# Altium PCB Sheet2.PcbDoc
Units mm, origin at the board's own origin, x right, y up, seen from the top; angles counter-clockwise.
Board outline 91.17 x 61.71 mm, 2 copper layers (Top Layer, Bottom Layer); 46 components, 37 nets, 171 pads, 0 vias.
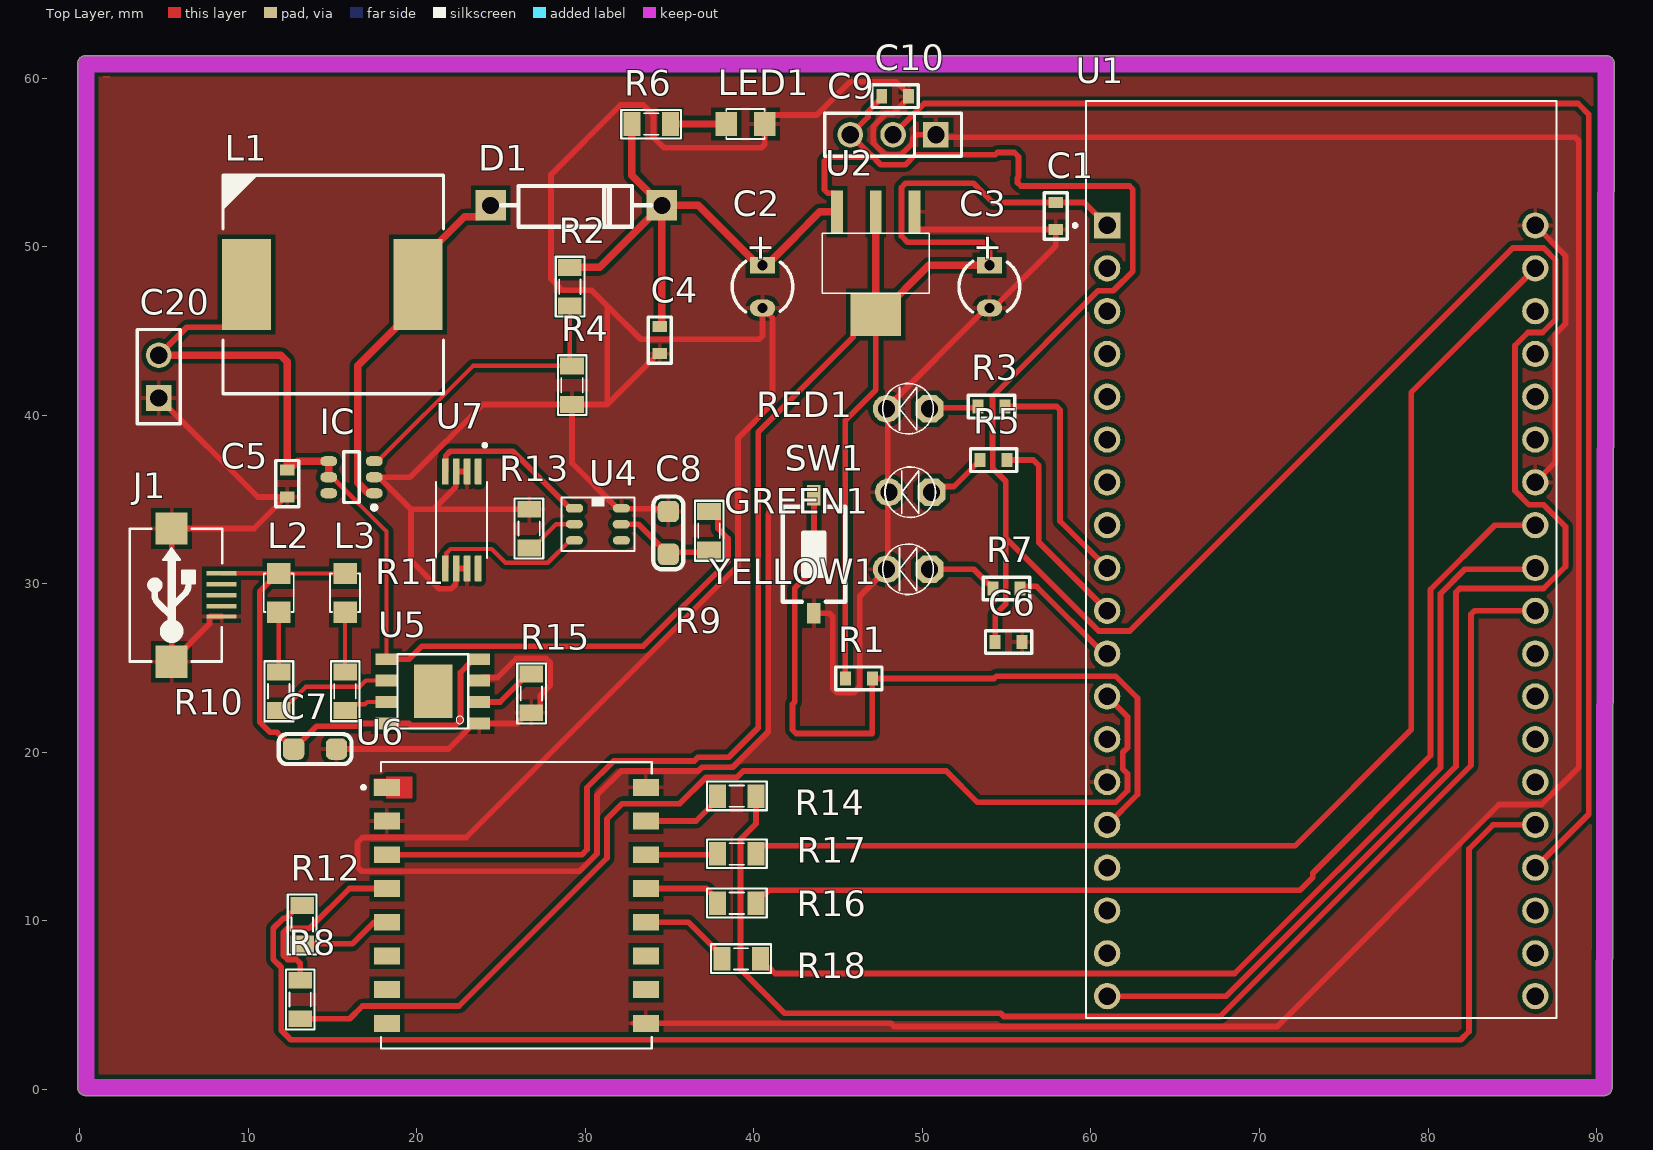
[diagram p0: Top Layer view]
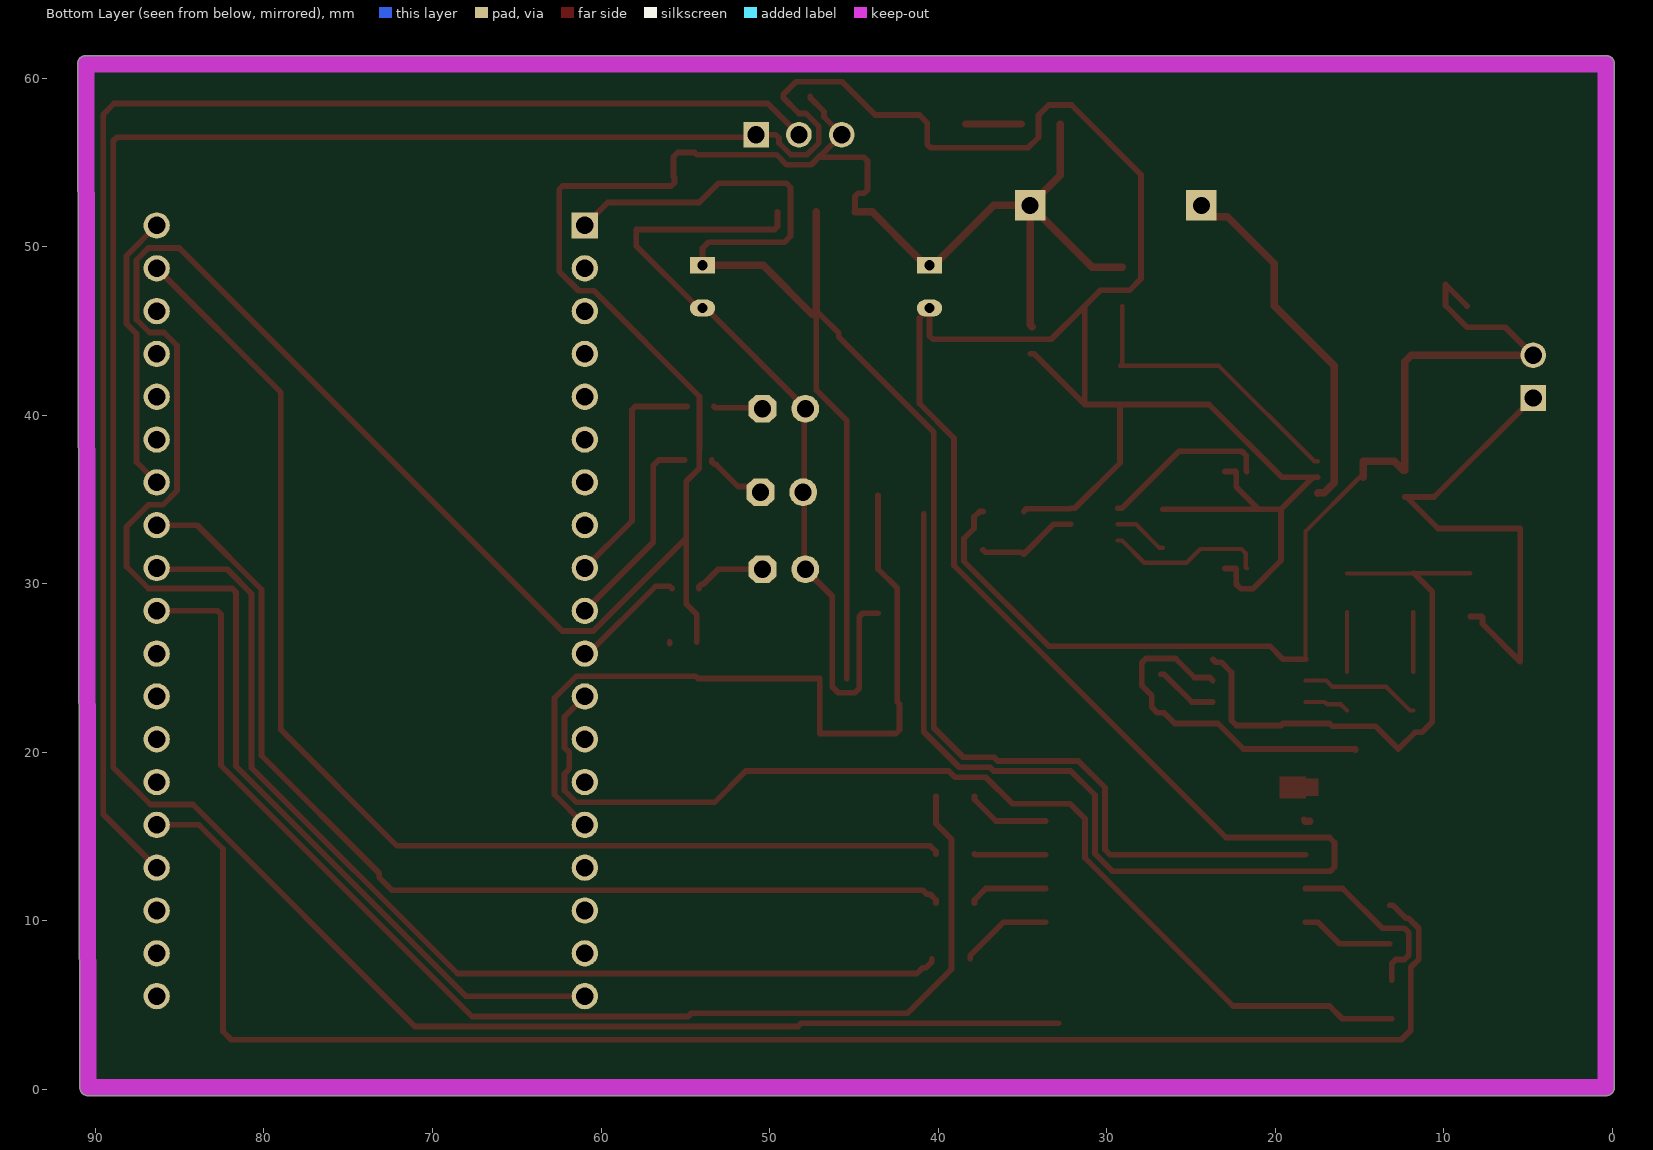
[diagram p1: Bottom Layer view, seen from below]
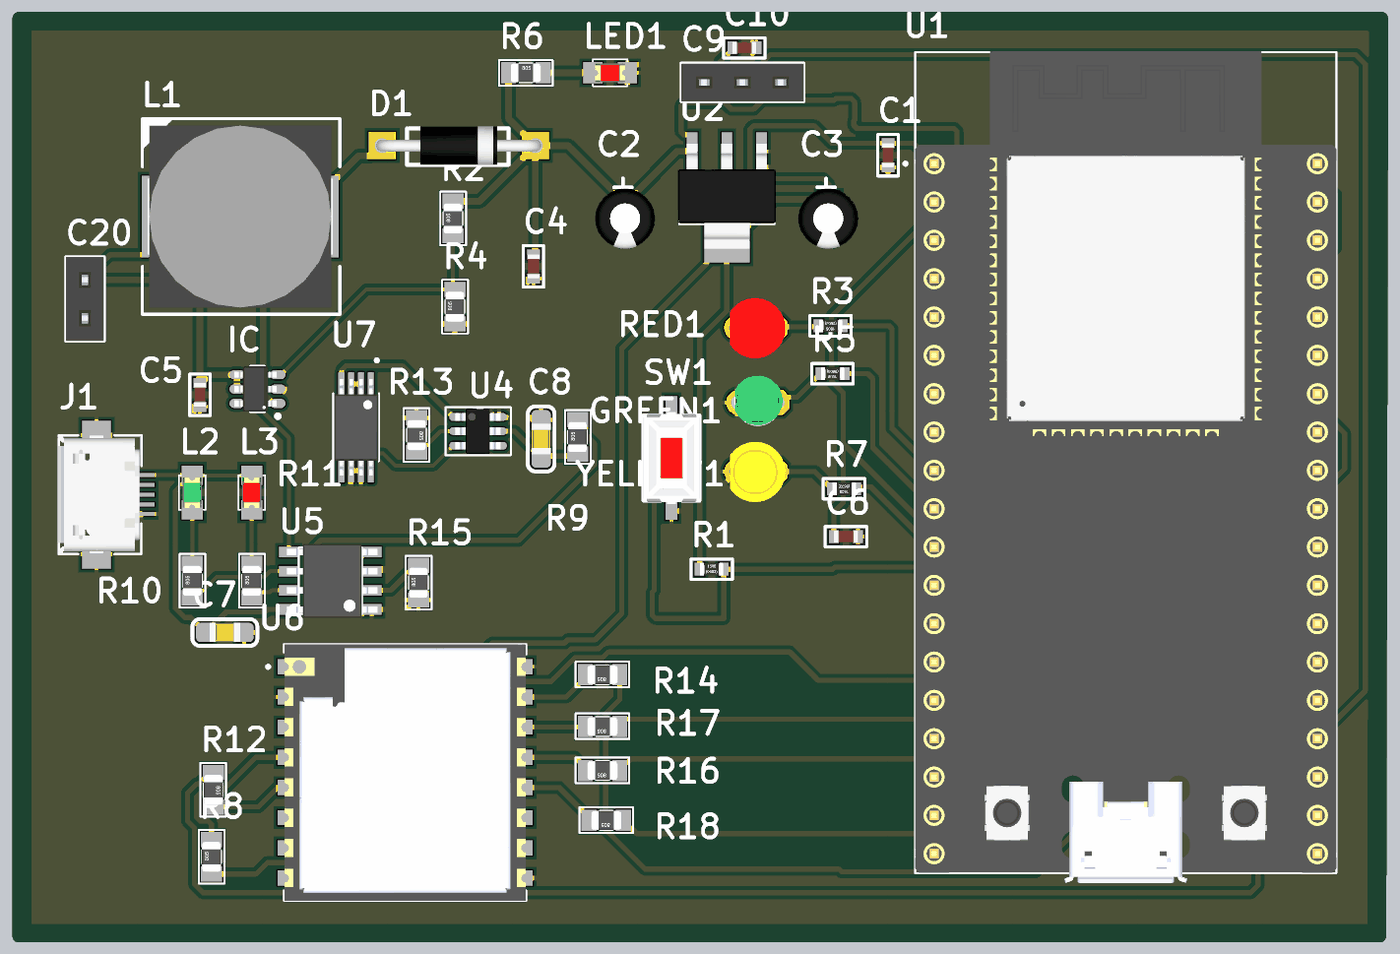
[diagram p2: 3D render of the assembled board from above, using the file's embedded part models]

## Layer stack, top to bottom
Top Solder: solder mask 0.0102, Solder Resist, Dk 3.5
Top Layer: signal copper 0.0356
Dielectric 1: dielectric 0.32, FR-4, Dk 4.8
Bottom Layer: signal copper 0.0356
Bottom Solder: solder mask 0.0102, Solder Resist, Dk 3.5

## Board outline
0.381,-0.373 cw(c0.381,0.127) -0.119,0.127 -0.119,60.833 cw(c0.381,60.833) 0.381,61.333 90.551,61.333 cw(c90.551,60.833) 91.051,60.833 91.051,60.832 90.924,0.126 cw(c90.424,0.127) 90.424,-0.373

## Design rules (kind name [scope] priority, off if disabled: settings)
Clearance [All] p1: gap=0.254 ignorepadtopadclearanceinfootprint=FALSE except(0: Arc-Hole Track-Hole SMDPad-Hole THPad-Hole Via-Hole Fill-Hole Poly-Hole Region-Hole Text-Hole)
PolygonConnect [All] p1: connectstyle=Relief reliefconductorwidth=0.254 reliefentries=4 polygonreliefangle="90 Angle" airgapwidth=0.254
RoutingVias [All] p1: holewidth=0.711 width=1.27 viastyle="Through Hole" minholewidth=0.711 minwidth=1.27 maxholewidth=0.711 maxwidth=1.27
SolderMaskExpansion [All] p1: expansion=0.102 istentingtop=FALSE
Width [All] p1: maxlimit=0.44 minlimit=0.254 preferedwidth=0.34
30 further rules are at their usual default settings.

## Components (designator, comment, footprint, x,y, rotation, side; value= is the part's Value field where it differs from the comment)
C1 "104" CAP0603 57.912,51.816 r270 top
C2 "10 uF" C3MM 40.513,47.625 r270 top
C3 "10 uF" C3MM 53.975,47.625 r270 top
C4 "22uF" CAP0603 34.417,44.45 r270 top
C5 "22uF" CAP0603 12.319,35.941 r270 top
C6 "104" CAP0603 55.118,26.543 r0 top
C7 "10uF" CAP_0805 13.97,20.193 r180 top value=33p
C8 "0.1 uF" CAP_0805 34.925,33.02 r270 top value=33p
C9 "JP3" JP3-C1T 50.8,56.642 r180 top
C10 "104" CAP0603 48.387,58.928 r0 top
C20 "JP2" JP2-C1T 4.699,41.021 r90 top
D1 "SS54" DIODE/POW/1A 24.384,52.451 r0 top
GREEN1 "LED" LED-3MM-GREEN 50.546,35.433 r180 top value="LED 3 ly Single Colour"
IC "MT3608" "TSOP 2" 16.129,36.322 r180 top
J1 "USB-5" USB-M1 8.429,29.324 r90 top
L1 "22uH" IND_400_500_212x114_SMD 14.986,47.752 r0 top
L2 "LED 0805" LED-0805-Green 11.811,30.607 r270 top
L3 "LED 0805" LED-0805-Red 15.748,30.607 r270 top
LED1 "LED" LED-0805-Red 38.354,57.277 r0 top value="LED 3 ly Single Colour"
R1 "1.1K" RES0603 46.228,24.384 r0 top value=1K
R2 "110K" RES-SMD-0805 29.083,47.625 r90 top
R3 "1.1K" RES0603 54.102,40.513 r180 top value=1K
R4 "15k" RES-SMD-0805 29.21,41.783 r90 top
R5 "1.1K" RES0603 54.229,37.338 r180 top value=1K
R6 "330" RES-SMD-0805 33.909,57.277 r0 top
R7 "1.1K" RES0603 54.991,29.718 r180 top value=1K
R8 "100" RES-SMD-0805 13.081,5.334 r90 top
R9 "100" RES-SMD-0805 37.338,33.147 r90 top
R10 "1k" RES-SMD-0805 11.811,23.622 r90 top
R11 "1k" RES-SMD-0805 15.748,23.622 r90 top
R12 "100" RES-SMD-0805 13.208,9.779 r270 top
R13 "1k" RES-SMD-0805 26.67,33.274 r270 top
R14 "100" RES-SMD-0805 38.989,17.399 r180 top
R15 "1.2k" RES-SMD-0805 26.797,23.495 r90 top
R16 "100" RES-SMD-0805 38.989,11.049 r180 top
R17 "100" RES-SMD-0805 38.989,13.97 r180 top
R18 "100" RES-SMD-0805 39.243,7.747 r180 top
RED1 "LED" LED-3MM-RED 50.419,40.386 r180 top value="LED 3 ly Single Colour"
SW1 "SW" SW1-SMD 43.561,31.75 r270 top value="SW chip 2 pin"
U1 "ESP32-DEVKITC-32D" MODULE_ESP32-DEVKITC-32D 73.66,31.496 r0 top
U2 "LM1117-3V3" LM1117-SOP 47.23,50.8 r180 top
U4 "DW01A" SOT23-6 30.861,33.655 r0 top
U5 "TP4056" TP4056 20.955,23.622 r180 top
U6 "RA-01H" XCVR_RA-01H 25.908,10.922 r0 top
U7 "FS8205A" FS8205A 22.606,33.782 r270 top
YELLOW1 "LED" LED-3MM-YELLOW 50.419,30.861 r180 top value="LED 3 ly Single Colour"

## Footprints (in the part's own frame and the unit in brackets; to place one, negate y for a bottom-side part, rotate by r counter-clockwise, add the part's x,y. Pads: shape width x height; smd on the part's side, far side on the other; paste and mask are expansions set on the pad)
C3MM [mm]
  rect 1x1.5 hole 0.6: 1(-1.27,0)
  oval 1x1.5 hole 0.6: 2(1.27,0)
  silkscreen extent -1.5,-1.81 1.5,1.8, body extent -2,-2.03 1.99,1.97, height 7.01
CAP0603 [mm]
  rect 0.65x0.85 smd: 1(-0.8,0) 2(0.8,0)
  silkscreen extent -1.38,-0.67 1.38,0.67, body extent -0.8,-0.4 0.8,0.4, height 0.79
CAP_0805 [mm]
  rrect50% 1.27x1.27 smd: 1(-1.27,0) 2(1.27,0)
  silkscreen extent -2.16,-0.89 2.16,0.89, body extent -1.01,-0.64 1.01,0.64, height 0.61
DIODE/POW/1A [mm]
  rect 1.8x1.8 hole 1: 1(0,0) 2(10.16,0)
  silkscreen extent 0.64,-1.27 9.53,1.14, body extent -0.38,-1.28 10.54,1.28, height 2.55
FS8205A [mm]
  rrect25% 1.56x0.4 smd: 1(-2.88,1.031) 2(-2.88,0.381) 3(-2.88,-0.269) 4(-2.88,-0.919) 5(2.88,-0.919) 6(2.88,-0.269) 7(2.88,0.381) 8(2.88,1.031)
  silkscreen extent -4.54,-1.46 2.25,1.57, body extent -3.2,-1.4 3.2,1.53, height 1.2
IND_400_500_212x114_SMD [mm] "wurth inductor"
  rect 2.9x5.4 smd: 1(-5.08,0) 2(5.08,0)
  silkscreen extent -6.48,-6.48 6.6,6.48, body extent -6.12,-6.02 6.13,6.03, height 8.1
JP2-C1T [mm] "2 row, straight, gold plating"
  rect 1.52x1.52 hole 1.02: 1(0,0)
  round 1.52 hole 1.02: 2(2.54,0)
  silkscreen extent -1.52,-1.27 4.06,1.27, body extent -1.52,-1.25 4.06,1.25, height 8.51
JP3-C1T [mm] "3 row, straight, gold plating"
  rect 1.52x1.52 hole 1.02: 1(0,0)
  round 1.52 hole 1.02: 2(2.54,0) 3(5.08,0)
  silkscreen extent -1.52,-1.27 6.6,1.27, body extent -1.52,-1.25 6.6,1.25, height 8.51
LED-3MM-GREEN [mil]
  oct 65x65 hole 40: 1(0,0)
  round 65 hole 40: 2(100,0)
  silkscreen extent -9,-59 109,59, body extent -15,-70 112,60, height 182
LED-3MM-RED [mil]
  oct 65x65 hole 40: 1(0,0)
  round 65 hole 40: 2(100,0)
  silkscreen extent -9,-59 109,59, body extent -27,-77 117,80, height 181
LED-3MM-YELLOW [mil]
  oct 65x65 hole 40: 1(0,0)
  round 65 hole 40: 2(100,0)
  silkscreen extent -9,-59 109,59, body extent -27,-77 117,80, height 181
LED-0805-Green [mil]
  rect 50x55 smd: 1(0,0) 2(90,0)
  silkscreen extent 0,-35 90,35, body extent 5,-25 85,25, height 43
LED-0805-Red [mil]
  rect 50x55 smd: 1(0,0) 2(90,0)
  silkscreen extent 0,-35 90,35, body extent 5,-25 85,25, height 43
LM1117-SOP [mm]
  rect 0.7x2.54 smd: 1(-2.3,-1.27) 2(0,-1.27) 3(2.3,-1.27)
  rect 3x2.54 smd: 2(0,4.826)
  silkscreen extent -3.18,0 3.17,3.56, body extent -3.25,-1.78 3.25,5.18, height 1.68
MODULE_ESP32-DEVKITC-32D [mm]
  rect 1.56x1.56 / inner round 1.56 / far side rect 1.56x1.56 hole 1.04: J2-1(-12.7,19.76)
  round 1.56 hole 1.04: J2-2(-12.7,17.22) J2-3(-12.7,14.68) J2-4(-12.7,12.14) J2-5(-12.7,9.6) J2-6(-12.7,7.06) J2-7(-12.7,4.52) J2-8(-12.7,1.98) J2-9(-12.7,-0.56) J2-10(-12.7,-3.1) J2-11(-12.7,-5.64) J2-12(-12.7,-8.18) J2-13(-12.7,-10.72) J2-14(-12.7,-13.26) J2-15(-12.7,-15.8) J2-16(-12.7,-18.34) J2-17(-12.7,-20.88) J2-18(-12.7,-23.42) J2-19(-12.7,-25.96) J3-1(12.7,19.76) J3-2(12.7,17.22) J3-3(12.7,14.68) J3-4(12.7,12.14) J3-5(12.7,9.6) J3-6(12.7,7.06) J3-7(12.7,4.52) J3-8(12.7,1.98) J3-9(12.7,-0.56) J3-10(12.7,-3.1) J3-11(12.7,-5.64) J3-12(12.7,-8.18) J3-13(12.7,-10.72) J3-14(12.7,-13.26) J3-15(12.7,-15.8) J3-16(12.7,-18.34) J3-17(12.7,-20.88) J3-18(12.7,-23.42) J3-19(12.7,-25.96)
  silkscreen extent -14.7,-27.25 13.95,27.15, body extent -13.97,-27.9 13.97,27.2, height 6.69
RES0603 [mm]
  rect 0.65x0.85 smd: 1(-0.8,0) 2(0.8,0)
  silkscreen extent -1.38,-0.67 1.38,0.67, body extent -0.78,-0.42 0.77,0.43, height 0.45
RES-SMD-0805 [mil]
  rect 39.37x55 smd: 1(-45,0) 2(45,0)
  silkscreen extent -70,-34 70,33, body extent -39,-25 39,25, height 31
SOT23-6 [mil]
  oct 40x20 smd: 1(-59.41,32.4)
  oval 40x20 smd: 2(-59.41,-4.6) 3(-59.41,-42.6) 4(50.59,-42.6) 5(50,-5) 6(50.59,32.4)
  silkscreen extent -89,-68 81,57, body extent -64,-64 54,54, height 51
SW1-SMD [mm]
  rect 1.2x0.8 smd: 1(-3.5,0) 2(3.5,0)
  silkscreen extent -2.82,-1.85 2.82,1.85, body extent -3.05,-1.85 3.05,1.85, height 2.5
TP4056 [mm]
  rect 1.3x0.7 smd: 1(-2.75,1.905) 2(-2.75,0.635) 3(-2.75,-0.635) 4(-2.75,-1.905) 5(2.75,-1.905) 6(2.75,-0.635) 7(2.75,0.635) 8(2.75,1.905)
  rect 2.3x3.2 smd: GND(-0.025,0)
  silkscreen extent -2.1,-2.2 2.1,2.2, body extent -3.13,-2.45 2.87,2.45, height 1.75
"TSOP 2" [mm] "TSOP, 6-Leads, Body 2.90x1.60mm, Pitch 0.95mm, IPC Medium Density"
  oval 1x0.6 smd: 1(-1.35,0.95) 2(-1.35,0) 3(-1.35,-0.95) 4(1.35,-0.95) 5(1.35,0) 6(1.35,0.95)
  silkscreen extent -1.48,-1.5 0.45,1.92, body extent -1.27,-1.5 1.53,1.5, height 1.45
USB-M1 [mil]
  rect 10x70 smd: 1(51.18,0) 2(25.59,0) 3(0,0) 4(-25.59,0) 5(-50,0)
  rect 74.8x74.8 smd: 5(-155.51,116.84) 5(155.51,116.84)
  silkscreen extent -155,-1 155,215, body extent -157,5 158,218, height 107
XCVR_RA-01H [mm]
  rect 1.536x1 smd paste-2 mask+0: 1(-7.682,7)
  rect 1.536x1 smd: 2(-7.682,5) 3(-7.682,3) 4(-7.682,1) 5(-7.682,-1) 6(-7.682,-3) 7(-7.682,-5) 8(-7.682,-7) 9(7.682,-7) 10(7.682,-5) 11(7.682,-3) 12(7.682,-1) 13(7.682,1) 14(7.682,3) 15(7.682,5) 16(7.682,7)
  Top Layer region: -6.188,6.365 -7.724,6.365 -7.724,6.5 -8.45,6.5 -8.45,7.5 -7.724,7.5 -7.724,7.635 -6.188,7.635
  silkscreen extent -9.17,-8.5 8.03,8.5, body extent -8,-8.5 8,8.5, height 3.4

## Part data
C1 C4 C5 C6 C10: library part CC0603JRNPO9BN300, "CAP CER 30PF 50V NPO 0603", Manufacturer=Yageo, Operating Temperature="-55°C ~ 125°C", Package / Case="0603 (1608 Metric)", Ratings=-, Supplier Part Number 1=311-3357-1-ND, Temperature Coefficient="C0G, NP0", Tolerance=±5%, Voltage - Rated=50V, Applications="General Purpose", Category=Capacitors, ComponentLink1Description=http://www.yageo.com/documents/recent/UPY-GP_NP0_16V-to-50V_16.pdf, ComponentLink1URL=http://www.yageo.com/documents/recent/UPY-GP_NP0_16V-to-50V_16.pdf, Failure Rate=-, Features=-, Height - Seated (Max)=-, Lead Spacing=-, Lead Style=-, Manufacturer Part Number=CC0603JRNPO9BN300, Mounting Type="Surface Mount, MLCC", Notification="Current market demand for these product types have resulted in fluctuating and extending lead times. Lead times may differ.", Packaging="Cut Tape (CT)", Part Status=Active, Pricing 1="1=0.1, 10=0.041, 100=0.0182, 500=0.01302, 1000=0.01022 (USD)", RoHS="RoHS Compliant", Size / Dimension="0.063\" L x 0.032\" W (1.60mm x 0.80mm)", Stock 1=0, Supplier 1=Digi-Key, Thickness (Max)="0.035\" (0.90mm)"
C2 C3: library part "Cap Pol", "Polarized Capacitor (Axial)", LatestRevisionDate=17-Jul-2002, LatestRevisionNote="Re-released for DXP Platform.", PackageReference=POLAR0.8, Published=8-Jun-2000, Publisher="Altium Limited"
C7 C8: library part CapSMD, "Capacitor", LatestRevisionDate=17-Jul-2002, LatestRevisionNote="Re-released for DXP Platform.", PackageReference=RAD-0.3, Published=8-Jun-2000, Publisher="Altium Limited"
C9: "WR-PHD 2.54 mm Angled Socket Header", Manufacturer="W¨¹rth Elektronik eiSos GmbH", partNo=613003143121, ComponentLink1 Description=Manufacturer, ComponentLink1URL=http://www.we-online.com, ComponentLink2 Description=Datasheet, ComponentLink2URL=http://katalog.we-online.de/em/datasheet/6130xx143121.pdf, Created by="Karrer Zheng", Created Date="29 March 2013", NoPins=03
C20: "WR-PHD 2.54 mm Angled Socket Header", Manufacturer="W¨¹rth Elektronik eiSos GmbH", partNo=613002143121, ComponentLink1 Description=Manufacturer, ComponentLink1URL=http://www.we-online.com, ComponentLink2 Description=Datasheet, ComponentLink2URL=http://katalog.we-online.de/em/datasheet/6130xx143121.pdf, Created by="Karrer Zheng", Created Date="29 March 2013", NoPins=02
D1: library part "Diode Power", "Diode Power", PackageDocument=Aug-1999, ComponentLink1Description="Manufacturer Link", ComponentLink1URL=http://www.fairchildsemi.com/, ComponentLink2Description=Datasheet, ComponentLink2URL=http://www.fairchildsemi.com/ds/1N%2F1N5400.pdf, DatasheetDocument=1998, LatestRevisionDate=17-Jul-2002, LatestRevisionNote="Re-released for DXP Platform.", PackageReference=DO-201AD, Published=8-Jun-2000, Publisher="Altium Limited"
GREEN1 LED1 RED1 YELLOW1: "LED Single colour Green and Red"
J1: Manufacturer=FCI, Manufacturer Part Number=10118193-0001LF, Supplier Part Number 1=609-4616-1-ND, .Checked PCB=RF, .Checked SCH=MM, .Creator=MM, Category="Connectors, Interconnects", ComponentLink1Description=http://portal.fciconnect.com/Comergent//fci/drawing/10118193.pdf, ComponentLink1URL=http://portal.fciconnect.com/Comergent//fci/drawing/10118193.pdf, Connector Type="USB - micro B", Features="Shielded, Solder Retention", Gender=Receptacle, Ingress Protection=-, Mounting Type="Surface Mount, Right Angle, Horizontal", Number of Contacts=5, Packaging="Cut Tape (CT)", Pricing 1="1=0.46, 10=0.433, 25=0.3712, 50=0.3156, 100=0.3032, 250=0.27224, 500=0.25988 (USD)", RoHS="RoHS Compliant", Specifications="USB 2.0", Stock 1=28642, Supplier 1=Digi-Key
L1: library part IND_1mH-0.6A-20%-SMD, "1mH Shielded Wirewound Inductor 600mA 1.82Ohm Max Nonstandard", Alternate Part Number-1=NA, Case/Package=SMD, Manufacturer=Coilcraft, Manufacturer Part Number=74477030, Supplier Part Number-1=74477030, Supplier-1=WURTH
L2: library part "LED 0805 Xanh La", "Dán", Chung_Loai=Dán, Don_Vi=Con, Ma_Hang=MH002326, Ten_Linh_Kien="LED 0805 Màu Xanh Lá (Green)"
L3: library part "LED 0805 Do", "Dán", Chung_Loai=Dán, Don_Vi=Con, Ma_Hang=MH000897, Ten_Linh_Kien="LED 0805 Màu Đỏ (Red)"
R1 R3 R5 R7: library part RT0603FRD071KL, "RES SMD 1K OHM 1% 1/10W 0603", Manufacturer=Yageo, Operating Temperature="-55°C ~ 155°C", Package / Case="0603 (1608 Metric)", Power (Watts)="0.1W, 1/10W", Supplier Device Package=0603, Supplier Part Number 1=YAG5719CT-ND, Temperature Coefficient=±25ppm/°C, Tolerance=±1%, Category=Resistors, ComponentLink1Description=http://www.yageo.com/documents/recent/PYu-RT_1-to-0.01_RoHS_L_9.pdf, ComponentLink1URL=http://www.yageo.com/documents/recent/PYu-RT_1-to-0.01_RoHS_L_9.pdf, Composition="Thin Film", Failure Rate=-, Features="Moisture Resistant", Height - Seated (Max)="0.022\" (0.55mm)", Manufacturer Part Number=RT0603FRD071KL, Packaging="Cut Tape (CT)", Part Status=Active, Pricing 1="1=0.17, 10=0.143, 100=0.0561, 1000=0.02346, 2500=0.02151 (USD)", RoHS="RoHS Compliant", Size / Dimension="0.063\" L x 0.032\" W (1.60mm x 0.80mm)", Stock 1=0, Supplier 1=Digi-Key
R2 R4 R6 R8 R9 R10 R11 R12 R13 R14 R15 R16 R17 R18: library part "Resistor - SMD", "Resistor", Manufacturer="Generic Components", Class=Passive, Published=08/06/2000, Publisher="Altium Hobart Technology Centre"
SW1: library part SW2, "Switch button 2 pin"
U1: "WiFi Development Tools (802.11) ESP32 General Development Kit, ESP32-WROOM-32D on the board", Package=None, Check_prices=https://www.snapeda.com/parts/ESP32-DEVKITC-32D/Espressif+Systems/view-part/?ref=eda, MF="Espressif Systems", MP=ESP32-DEVKITC-32D, SnapEDA_Link=https://www.snapeda.com/parts/ESP32-DEVKITC-32D/Espressif+Systems/view-part/?ref=snap
U2: library part LM1117-ADJ, "800mA Low-Dropout Linear Regulator", Creator="Nguyen Ba Bien", Website=http://group3i.net
U4: "One Cell Lithium-ion/Polymer Battery Protection IC"
U5: "Complete single cell Li-Ion battery with a constant current / constant voltage linear charger"
U6: "MÃ´-Ä‘un thu phÃ¡t LoRaâ„¢ ISM < 1GHz chung KhÃ´ng bao gá»“m Äƒng-ten 803 MHz ~ 930 MHz GiÃ¡ treo bá» máº·t", Package=Package, Check_prices=https://www.snapeda.com/parts/RA-01H/AI-Thinker/view-part/?ref=eda, MF=AI-Thinker, MP=RA-01H, SnapEDA_Link=https://www.snapeda.com/parts/RA-01H/AI-Thinker/view-part/?ref=snap

## Nets (pads, with @x,y where several pads share a name; then routed paths per layer and width w, separated by ;. In a path a pad name is that pad's centre, name@x,y a point inside that pad or via, vN(x,y) a via of type N, cw(c..) or ccw(c..) an arc to the next point about the centre after c; other vN are vias at no path point)
3V3: C1.1 C3.1 R1.1 U1.J2-1 U2.2 U6.3 | length 114
  Top Layer w0.34: U6.3@18.208,13.922 29.797,13.922 30.102,14.227 30.102,17.906 31.686,19.49 36.459,19.49 36.678,19.709 38.505,19.709 40.259,21.463 40.259,39.003 45.9,44.644 45.9,44.874 47,45.974 47.23,45.974 47.23,41.504 45.428,39.702 R1.1 ; C3.1 53.975,49.905 53.615,50.265 49.116,50.265 48.756,50.624 48.756,53.516 49.004,53.764 53.026,53.764 54.174,52.616 C1.1 59.6,52.616 U1.J2-1
  Top Layer w0.44: U2.2@47.244,52.084 47.23,52.07 47.23,45.974 47.46,45.974 50.381,48.895 C3.1
5v: C2.1 C4.1 C6.1 C9.3 C10.1 D1.2 R2.2 R6.1 U1.J2-19 U2.3 | length 203.4
  Top Layer w0.34: U2.3 44.93,52.99 44.75,53.17 44.395,53.17 44.196,53.369 44.196,55.101 44.395,55.3 46.904,55.3 ; C10.1 47.587,58.828 46.769,58.01 46.769,57.691 C9.3 46.904,55.458 46.93,55.458 47.524,54.864 48.996,54.864 49.59,55.458 54.324,55.458 54.452,55.586 55.454,55.586 55.702,55.338 55.702,54.136 55.64,54.075 55.64,53.793 55.84,53.594 62.285,53.594 62.484,53.395 62.484,48.537 61.327,47.38 60.419,47.38 54.153,41.114 54.153,37.964 54.178,37.939 54.178,36.839 54.94,36.077 54.94,32.713 ; C6.1 54.318,28.17 54.94,28.792 54.94,32.713 ; U1.J2-19 68.02,5.536 81.661,19.177 81.661,29.502 81.881,29.723 86.849,29.723 88.158,31.031 88.158,33.381 86.859,34.68 85.993,34.68 85.156,35.517 85.156,44.135 85.927,44.906 86.793,44.906 87.564,45.677 87.564,49.215 86.859,49.92 85.024,49.92 62.296,27.192 60.461,27.192 54.94,32.713
  Top Layer w0.44: R2.2 30.861,48.768 D1.2 ; R6.1 32.766,54.229 D1.2 ; C4.1 34.439,45.25 34.544,45.355 D1.2 ; U2.3 43.92,52.07 42.482,50.632 42.482,50.614 40.763,48.895 C2.1 40.263,48.895 36.707,52.451 D1.2
Data: C9.2 U1.J3-16 | length 88.3
  Top Layer w0.34: C9.2 50.106,58.488 88.887,58.488 89.526,57.848 89.526,16.322 U1.J3-16
DIO0: R12.2 U6.5 | length 5.5
  Top Layer w0.34: R12.2 16.172,8.636 17.458,9.922 U6.5@18.208,9.922
GND: C1.2 C2.2 C3.2 C4.2 C5.2 C6.2 C7.1 C8.1 C9.1 C10.2 C20.1 GREEN1.2 IC.2 J1.5 LED1.2 R4.1 R13.1 R15.1 RED1.2 SW1.2 U1.J2-14 U1.J3-1 U1.J3-7 U2.1 U4.6 U5.1 U5.3 U6.2 U6.9 U6.16 U7.2 U7.3 U7.6 U7.7 YELLOW1.2 | length 460.7
  Top Layer w0.34: C20.1@4.572,41.402 C20.1@4.699,41.275 ; C20.1 10.579,35.141 C5.2@12.219,35.141 ; J1.5@8.429,28.054 7.753,28.054 7.71,28.011 7.71,27.623 5.461,25.374 5.461,33.274 10.352,33.274 C5.2@12.219,35.141 ; C5.2 C5.2@12.219,35.141 ; C7.1@15.24,20.14 C7.1 21.881,20.193 23.405,21.717 U5.1 25.964,21.717 26.599,22.352 R15.1 26.995,22.352 27.326,22.682 27.326,23.368 27.919,23.962 27.919,25.314 27.671,25.562 25.923,25.562 24.798,24.437 23.885,24.437 U5.3 ; IC.2 IC.2@17.749,36.322 ; U6.2@18.208,15.922 U6.2@18.308,16.022 ; U7.7 U7.6 22.311,30.876 22.311,29.976 22.033,29.698 21.341,29.698 19.66,31.379 19.66,34.415 ; U7.2 U7.3 22.311,36.636 22.311,35.736 20.99,34.415 ; R13.1 26.668,34.415 20.99,34.415 ; U6.9@32.858,3.922 48.129,3.922 48.313,3.738 71.048,3.738 84.21,16.9 86.727,16.9 88.932,19.106 88.932,56.283 88.733,56.483 50.959,56.483 C9.1 49.643,56.642 49.444,56.443 49.444,56.152 48.75,55.458 47.77,55.458 47.076,56.152 47.076,57.132 47.846,57.903 48.262,57.903 49.187,58.828 C10.2 49.187,59.028 48.438,59.777 45.707,59.777 43.736,57.806 41.105,57.806 40.64,57.34 LED1.2 40.64,56.069 40.441,55.869 34.661,55.869 34.052,56.479 34.052,57.79 33.442,58.399 32.09,58.399 27.961,54.27 27.961,48.092 28.647,47.406 30.38,47.406 31.307,46.479 ; C4.2@34.517,43.65 C4.2 34.317,43.65 31.307,40.64 ; C8.1 34.769,34.446 32.178,34.446 U4.6 31.892,34.478 29.21,37.16 R4.1 ; 40.853,34.142 40.853,21.217 38.752,19.115 36.924,19.115 36.705,18.896 32.132,18.896 30.696,17.46 30.696,13.981 29.663,12.948 16.732,12.948 16.484,13.196 16.484,14.648 16.784,14.948 22.92,14.948 39.054,31.082 39.054,38.639 41.107,40.691 41.107,45.761 40.889,45.979 40.889,46.05 40.584,46.355 C2.2 40.513,44.704 40.31,44.501 33.285,44.501 31.307,46.479 ; SW1.2 44.471,28.25 44.679,28.042 44.679,23.783 44.927,23.535 45.929,23.535 46.279,23.885 46.279,29.261 YELLOW1.2 47.942,30.924 47.942,35.369 GREEN1.2 47.942,35.496 47.942,40.322 RED1.2 47.879,40.447 53.787,46.355 C3.2 54.225,46.355 57.912,50.042 C1.2 49.71,51.016 49.53,51.196 U2.1 ; C6.2@55.918,26.443 C6.2 ; U1.J3-7 87.564,37.22 87.564,44.837 88.158,45.431 88.158,49.461 86.363,51.256 U1.J3-1 ; IC.2@17.749,36.322 19.607,36.322 23.925,40.64 R4.1 ; IC.2@17.749,36.322 17.975,36.096 17.979,36.096 19.66,34.415 ; 19.66,34.415 20.99,34.415 ; R4.1 31.307,40.64 ; 31.307,40.64 31.307,46.479
  Top Layer w0.44: U6.2@17.958,15.922 18.208,15.922 U6.2
GREEN: R5.1 U1.J2-10 | length 12.3
  Top Layer w0.34: R5.1 56.57,37.338 56.896,37.012 56.896,32.46 U1.J2-10
IO2: R12.1 U1.J3-15 | length 94.8
  Top Layer w0.34: R12.1 13.01,10.922 12.242,10.154 12.088,10.154 11.492,9.558 11.492,7.714 11.959,7.247 11.959,3.515 12.526,2.948 81.942,2.948 82.423,3.429 82.423,14.273 83.846,15.696 U1.J3-15
IO5: R14.1 U1.J3-10 | length 74.2
  Top Layer w0.34: R14.1 40.132,15.768 39.208,14.844 39.208,7.127 41.819,4.516 54.645,4.516 54.829,4.332 67.656,4.332 82.55,19.226 82.55,28.197 82.749,28.396 U1.J3-10
IO13: R1.2 SW1.1 U1.J2-15 | length 47.1
  Top Layer w0.34: SW1.1 43.561,30.872 42.418,29.729 42.418,22.987 42.291,22.86 42.291,21.336 42.507,21.12 47.028,21.12 R1.2 54.253,24.384 54.389,24.52 61.459,24.52 62.758,23.221 62.758,17.491 60.963,15.696 U1.J2-15
IO14: R8.1 U1.J2-12 | length 63.9
  Top Layer w0.34: R8.1 16.027,4.191 16.784,4.948 22.503,4.948 31.29,13.735 31.29,16.054 32.184,16.948 35.597,16.948 37.17,18.521 38.998,18.521 39.372,18.896 51.408,18.896 53.272,17.032 61.459,17.032 62.164,17.737 62.164,18.735 61.89,19.009 61.89,20.003 62.164,20.277 62.164,22.112 U1.J2-12
IO18: R18.1 U1.J3-9 | length 62.5
  Top Layer w0.34: R18.1 40.386,7.549 40.716,7.218 40.915,7.218 41.261,6.872 68.516,6.872 80.731,19.087 80.731,29.412 82.18,30.861 86.285,30.861 U1.J3-9
IO19: R16.1 U1.J3-8 | length 61.6
  Top Layer w0.34: R16.1 40.132,11.247 40.462,11.578 40.661,11.578 40.903,11.82 72.399,11.82 73.152,12.573 73.152,12.827 80.137,19.812 80.137,29.658 83.955,33.476 U1.J3-8
IO23: R17.1 U1.J3-2 | length 72.4
  Top Layer w0.34: R17.1 40.132,14.121 40.462,14.451 72.109,14.451 78.994,21.336 78.994,41.35 U1.J3-2
MISO: R16.2 U6.13 | length 4.7
  Top Layer w0.34: U6.13@33.608,11.922 37.172,11.922 37.846,11.247 R16.2
MOSI: R17.2 U6.14 | length 4.3
  Top Layer w0.34: U6.14@33.608,13.922 37.798,13.922 R17.2
NetC8_2: C8.2 R9.1 U4.5 | length 6
  Top Layer w0.34: U4.5 33.147,33.528 C8.2 35.052,31.877 37.211,31.877 R9.1
NetD1_1: D1.1 IC.1 L1.2 | length 21.5
  Top Layer w0.44: IC.1 17.448,35.403 17.104,35.403 16.505,36.001 16.505,42.941 20.066,46.502 L1.2 20.066,49.002 22.835,51.771 23.704,51.771 D1.1
NetGREEN1_1: GREEN1.1 R5.2 | length 3.7
  Top Layer w0.34: GREEN1.1 50.888,35.775 51.866,35.775 53.174,37.083 53.274,37.083 53.429,37.238 R5.2
NetIC_3: IC.3 R2.1 R4.2 | length 17.7
  Top Layer w0.254: IC.3 17.679,37.272 23.333,42.926 R4.2 29.083,43.053 R2.1
NetL2_2: L2.2 R10.2 | length 3.6
  Top Layer w0.254: R10.2 L2.2
NetL3_2: L3.2 R11.2 | length 3.6
  Top Layer w0.254: R11.2 L3.2
NetLED1_1: LED1.1 R6.2 | length 3.3
  Top Layer w0.44: R6.2 LED1.1
NetR3_2: R3.2 RED1.1 | length 2.9
  Top Layer w0.34: RED1.1 50.482,40.449 53.238,40.449 R3.2
NetR7_2: R7.2 YELLOW1.1 | length 4.3
  Top Layer w0.34: YELLOW1.1 53.048,30.861 53.936,29.973 54.036,29.973 54.191,29.818 R7.2
NetR10_1: R10.1 U5.6 | length 7.1
  Top Layer w0.254: R10.1 12.009,22.479 13.414,23.884 16.604,23.884 16.977,24.257 U5.6
NetR11_1: R11.1 U5.7 | length 2.7
  Top Layer w0.254: R11.1 16.121,22.852 16.933,22.852 17.068,22.987 U5.7
NetR13_2: R13.2 U4.2 | length 3.3
  Top Layer w0.254: R13.2 26.868,32.131 28.265,33.528 29.342,33.528 U4.2
NetR15_2: R15.2 U5.2 | length 3.8
  Top Layer w0.34: U5.2 24.948,22.987 26.599,24.638 R15.2
NetU4_1: U4.1 U7.4 | length 10.1
  Top Layer w0.34: U7.4 21.713,36.688 21.713,37.588 21.991,37.866 25.71,37.866 29.098,34.478 U4.1
NetU4_3: U4.3 U7.5 | length 9.5
  Top Layer w0.254: U7.5 21.756,30.971 21.756,31.811 22.008,32.063 24.451,32.063 25.264,31.25 27.775,31.25 29.098,32.573 U4.3
NSS: R14.2 U6.15 | length 5
  Top Layer w0.34: U6.15@33.608,15.922 36.567,15.922 37.846,17.201 R14.2
RED: R3.1 U1.J2-9 | length 13.9
  Top Layer w0.34: R3.1 57.967,40.513 58.166,40.314 58.166,33.73 U1.J2-9
RST: R8.2 U6.4 | length 10.8
  Top Layer w0.34: R8.2 13.081,7.487 12.856,7.712 12.334,7.712 12.086,7.96 12.086,9.312 12.334,9.56 13.644,9.56 16.006,11.922 U6.4@18.208,11.922
SCK: R18.2 U6.12 | length 5.5
  Top Layer w0.34: U6.12@33.608,9.922 36.124,9.922 38.1,7.945 R18.2
VBat+: C5.1 C20.2 IC.4 IC.5 L1.1 R9.2 U5.5 | length 65.9
  Top Layer w0.254: IC.5 14.992,36.322 18.205,33.109 U5.5
  Top Layer w0.34: C20.2 6.36,45.222 8.626,45.222 9.906,46.502 L1.1 L1.1@8.626,46.472 ; U5.5 19.536,25.527 20.31,26.301 33.433,26.301 38.46,31.328 38.46,32.68 37.867,33.274 37.867,33.96 37.536,34.29 R9.2
  Top Layer w0.44: C20.2 11.934,43.561 12.319,43.176 C5.1 12.419,36.741 12.95,37.272 IC.4 IC.5
VCC: C7.2 J1.1 L2.1 L3.1 U5.4 U5.8 | length 34.3
  Top Layer w0.254: J1.1 L2.1@11.764,30.624 ; L2.1@11.794,30.624 L2.1 L3.1
  Top Layer w0.34: L2.1@11.794,30.624 11.764,30.624 10.689,29.548 10.689,21.803 11.307,21.185 11.708,21.185 C7.2 14.062,21.555 16.622,21.555 16.784,21.717 U5.8 19.536,21.717 19.655,21.598 22.306,21.598 22.593,21.885 22.593,24.744 23.195,25.347 23.525,25.347 U5.4
YELLOW: R7.1 U1.J2-11 | length 6.9
  Top Layer w0.34: R7.1 55.918,29.845 56.769,29.845 60.758,25.856 U1.J2-11
pads on no net: IC.6 J1.2 J1.3 J1.4 U1.J2-2 U1.J2-3 U1.J2-4 U1.J2-5 U1.J2-6 U1.J2-7 U1.J2-8 U1.J2-13 U1.J2-16 U1.J2-17 U1.J2-18 U1.J3-3 U1.J3-4 U1.J3-5 U1.J3-6 U1.J3-11 U1.J3-12 U1.J3-13 U1.J3-14 U1.J3-17 U1.J3-18 U1.J3-19 U4.4 U5.GND U6.1 U6.6 U6.7 U6.8 U6.10 U6.11 U7.1 U7.8

## Polygon pours and split planes (outlines as drawn)
GND on Top Layer "GND_L01_P007" (solid, remove dead copper, pour order 7): 0.762,60.325 89.916,60.325 89.916,0.889 89.662,0.635 0.889,0.635
no net on Top Layer "NONET_L01_P001" (solid, remove dead copper, pour order 1): 1.524,60.071 1.397,60.071 1.778,60.071

## Keep-outs
Keep-Out Layer:
  lines w1: 0.381,0.127 0.381,60.833 90.551,60.833 90.424,0.127 0.381,0.127

## Text inside footprints (layer, text, board x,y; h text height)
C2: Top Overlay "+" at 39.751,50.8 h1.52 r270
C3: Top Overlay "+" at 53.213,50.8 h1.52 r270